# Altium PCB Example.PcbDoc
Units mil, origin at the board's own origin, x right, y up, seen from the top; angles counter-clockwise.
Board outline 995 x 590 mil, 2 copper layers (Top Layer, Bottom Layer); 8 components, 16 nets, 36 pads, 6 vias.
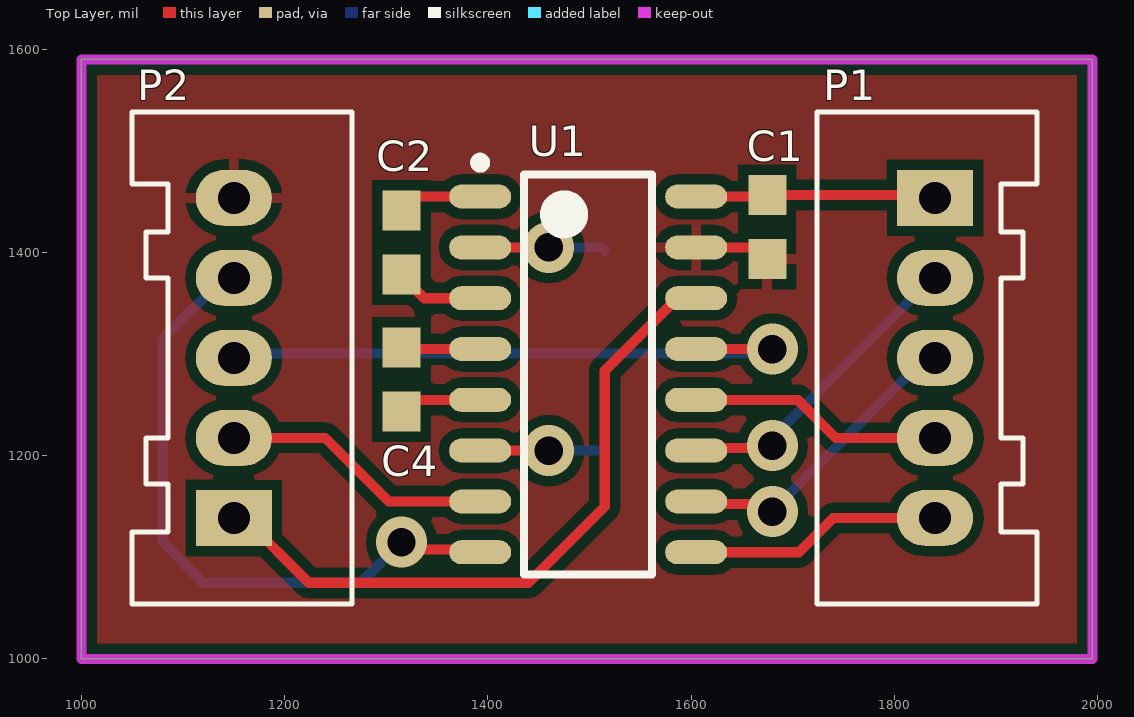
[diagram p0: Top Layer view]
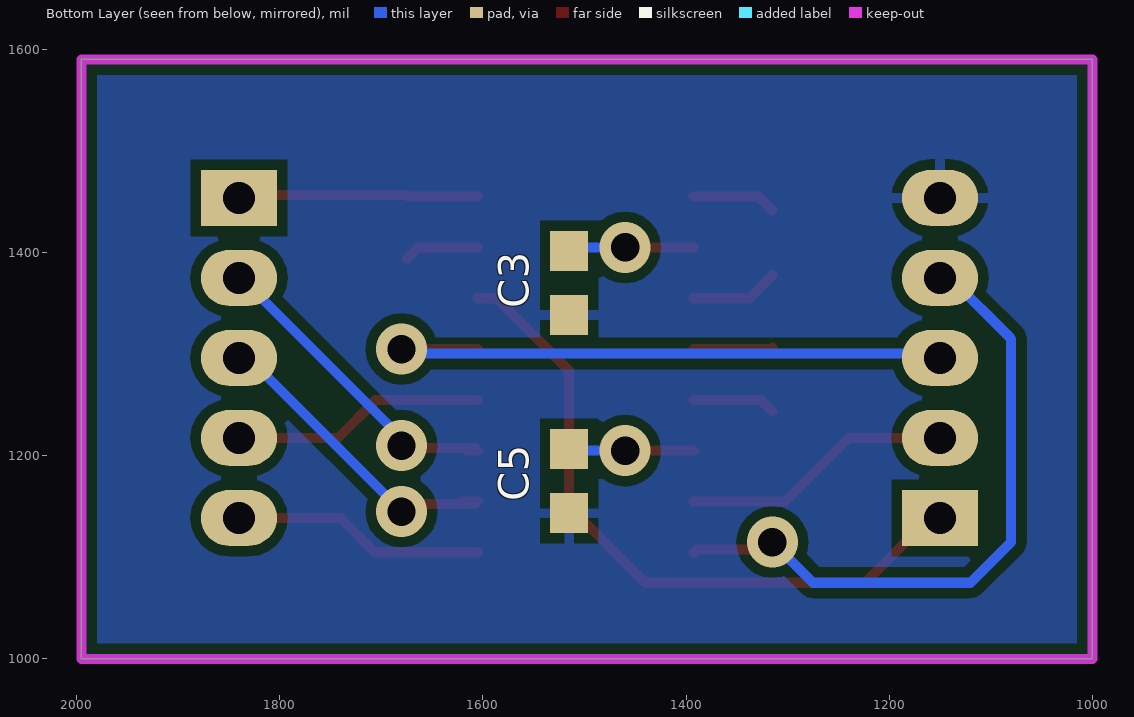
[diagram p1: Bottom Layer view, seen from below]

## Layer stack, top to bottom
Top Solder: solder mask 0.4, Solder Resist, Dk 3.5
Top Layer: signal copper 1.4
Dielectric 1: dielectric 12.6, FR-4, Dk 4.8
Bottom Layer: signal copper 1.4
Bottom Solder: solder mask 0.4, Solder Resist, Dk 3.5

## Board outline
1000,1000 1000,1590 1995,1590 1995,1000

## Design rules (kind name [scope] priority, off if disabled: settings)
Clearance [All] p1: gap=10 ignorepadtopadclearanceinfootprint=FALSE except(0: Arc-Hole Track-Hole SMDPad-Hole THPad-Hole Via-Hole Fill-Hole Poly-Hole Region-Hole Text-Hole; 5: Track-Track Track-SMDPad SMDPad-SMDPad; 7: Track-Via)
HoleSize [All] p1: absolutevalues=TRUE maxlimit=150 minlimit=10 maxpercent=80.000 minpercent=20.000
MinimumAnnularRing [All] p1: minimumring=7
MinimumSolderMaskSliver [All] p1: minsoldermaskwidth=1
PolygonConnect [All] p1: connectstyle=Relief reliefconductorwidth=10 reliefentries=4 polygonreliefangle="90 Angle" airgapwidth=10
RoutingVias [All] p1: holewidth=10 width=22 viastyle="Through Hole" minholewidth=10 minwidth=22 maxholewidth=100 maxwidth=150
SilkToSolderMaskClearance [IsPad] p1: minsilkscreentomaskgap=5 clearancetoexposedcopper=TRUE
SolderMaskExpansion [All] p1: expansion=4
Width [All] p1: maxlimit=150 minlimit=8 preferedwidth=10
27 further rules are at their usual default settings.

## Components (designator, comment, footprint, x,y, rotation, side; value= is the part's Value field where it differs from the comment)
C1 "Cap" CAPC0603 1675,1425 r270 top value=1uF
C2 "Cap" CAPC0603 1315,1410 r270 top value=1uF
C3 "Cap" CAPC0603 1515,1370 r270 bottom value=1uF
C4 "Cap" CAPC0603 1315,1275 r270 top value=1uF
C5 "Cap" CAPC0603 1515,1175 r270 bottom value=1uF
P1 "MOLEX-HDR-1x5-SHERLOCK_VERT" MOLEX-HDR-1X5-SHERLOCK-VERT 1840,1453.74 r90 top
P2 "MOLEX-HDR-1x5-SHERLOCK_VERT" MOLEX-HDR-1X5-SHERLOCK-VERT 1150,1138.78 r270 top
U1 "*RS-232" RS-232 1498.7,1280 r0 top (schematic designator *U1)

## Footprints (in the part's own frame and the unit in brackets; to place one, negate y for a bottom-side part, rotate by r counter-clockwise, add the part's x,y. Pads: shape width x height; smd on the part's side, far side on the other; paste and mask are expansions set on the pad)
CAPC0603 [mm] "Chip Capacitor, 2-Leads, Body 1.60x0.80mm, IPC Medium Density"
  rect 1x0.95 smd: 1(-0.8,0) 2(0.8,0)
  body extent -0.88,-0.48 0.87,0.48, height 0.8
MOLEX-HDR-1X5-SHERLOCK-VERT [mm]
  rect 1.397x1.905 hole 0.8: 1(0,0)
  oval 1.397x1.905 hole 0.8: 2(-2,0) 3(-4,0) 4(-6,0) 5(-8,0)
  silkscreen extent -10.15,-2.55 2.15,2.95, body extent -10.16,-2.57 2.14,2.98, height 8.5
RS-232 [mm] "IC DVR/RCVR RS232 DUAL 16SOIC"
  oval 1.55x0.6 smd: 1(-2.7,4.445) 2(-2.7,3.175) 3(-2.7,1.905) 4(-2.7,0.635) 5(-2.7,-0.635) 6(-2.7,-1.905) 7(-2.7,-3.175) 8(-2.7,-4.445) 9(2.7,-4.445) 10(2.7,-3.175) 11(2.7,-1.905) 12(2.7,-0.635) 13(2.7,0.635) 14(2.7,1.905) 15(2.7,3.175) 16(2.7,4.445)
  silkscreen extent -2.82,-5 1.6,5.42, body extent -2,-5 2,5, height 1.75

## Part data
C1 C2 C3 C4 C5: Supplier Part Number 1=1276-1000-1-ND, Supplier 1=Digi-Key
P1 P2: "Header, Molex, 2mm Pitch Sherlock Header, Single Row, Vertical, 5 Circuits, Length 3.3mm, 0353620550"
U1: library part RS-232, "IC DVR/RCVR RS232 DUAL 16SOIC", Manufacturer 1="*Texas Instruments", Supplier Part Number 1=*296-25009-1-ND, ComponentLink1Description=Datasheet, ComponentLink1URL=*http://www.ti.com/lit/ds/symlink/trs232.pdf, ComponentLink2Description=Website, ComponentLink2URL=https://www.digikey.com/product-detail/en/texas-instruments/TRS232DR/296-25009-1-ND/2136546, Manufacturer Part Number 1=*RS-232, Supplier 1=*Digi-Key

## Via types
v1: diameter 50, hole 28, Top Layer to Bottom Layer, 6 vias

## Nets (pads, with @x,y where several pads share a name; then routed paths per layer and width w, separated by ;. In a path a pad name is that pad's centre, name@x,y a point inside that pad or via, vN(x,y) a via of type N, cw(c..) or ccw(c..) an arc to the next point about the centre after c; other vN are vias at no path point)
5V: C1.1 P1.1 U1.16 | length 236.8
  Top Layer w10: U1.16 1673.5,1455 C1.1 1837.24,1456.5 P1.1
GND: C1.2 C3.2 C5.2 P2.5 U1.15 | length 74.8
  Top Layer w10: U1.15 1663.5,1405 C1.2
Net*U1_1: C2.1 U1.1 | length 83
  Top Layer w10: C2.1 1328.5,1455 U1.1
Net*U1_2: C3.1 U1.2 | length 124
  Top Layer w10: U1.2 v1(1460,1405)
  Bottom Layer w10: v1(1460,1405) 1511.5,1405 C3.1
Net*U1_3: C2.2 U1.3 | length 87.7
  Top Layer w10: C2.2 1315,1377.52 1337.52,1355 U1.3
Net*U1_4: C4.1 U1.4 | length 78
  Top Layer w10: C4.1 1316.5,1305 U1.4
Net*U1_5: C4.2 U1.5 | length 82.2
  Top Layer w10: C4.2 1326.5,1255 U1.5
Net*U1_6: C5.1 U1.6 | length 123.2
  Top Layer w10: U1.6 v1(1460,1205)
  Bottom Layer w10: v1(1460,1205) 1513.5,1205 C5.1
R1IN: P2.3 U1.13 | length 608.6
  Top Layer w10: U1.13 v1(1680,1305)
  Bottom Layer w10: P2.3 1154.37,1300.63 1675.63,1300.63 v1(1680,1305)
R1OUT: P1.4 U1.12 | length 250.5
  Top Layer w10: U1.12 1705,1255 1742.48,1217.52 P1.4
R2IN: P2.4 U1.8 | length 644.5
  Top Layer w10: v1(1315,1115) 1322.39,1107.61 1389.8,1107.61 U1.8
  Bottom Layer w10: P2.4 1140,1375 1080,1315 1080,1115 1120,1075 1275,1075 v1(1315,1115)
R2OUT: P1.5 U1.9 | length 249
  Top Layer w10: U1.9 1706.22,1105 1740,1138.78 P1.5
T1IN: P1.2 U1.11 | length 332
  Top Layer w10: U1.11@1615,1205 U1.11 1607.5,1207.5 1615,1207.5 1677.5,1207.5 v1(1680,1210) ; P1.2@1831.39,1366.39 P1.2
  Bottom Layer w10: v1(1680,1210) 1680,1217.5 1837.5,1375 P1.2
T1OUT: P2.1 U1.14 | length 675.7
  Top Layer w10: P2.1 1160,1138.78 1223.78,1075 1440,1075 1515,1150 1515,1283.7 1586.3,1355 U1.14
T2IN: P1.3 U1.10 | length 317.2
  Top Layer w10: U1.10@1620,1155 U1.10 1607.61,1152.39 1620,1152.39 1672.61,1152.39 v1(1680,1145)
  Bottom Layer w10: v1(1680,1145) 1680,1145.63 1830.63,1296.26 P1.3
T2OUT: P2.2 U1.7 | length 268.3
  Top Layer w10: P2.2 1239.84,1217.52 1302.36,1155 U1.7

## Polygon pours and split planes (outlines as drawn)
GND on Bottom Layer "Bottom Layer-GND" (solid, pour order 18): 1000,1000 1995,1000 1995,1590 1000,1590
no net on Bottom Layer "Bottom Layer-No Net" (solid, pour order 12): 2095,1530
no net on Bottom Layer "Bottom Layer-No Net 1" (solid, pour order 10): 2095,1530
GND on Top Layer "Top Layer-GND" (solid, pour order 16): 1000,1000 1995,1000 1995,1590 1000,1590

## Keep-outs
Keep-Out Layer:
  the board outline again, w10